# Altium PCB PCB1.PcbDoc (part 1 of 2)
Units mil, origin at the board's own origin, x right, y up, seen from the top; angles counter-clockwise.
Board outline 6000 x 4000 mil, 2 copper layers (Top Layer, Bottom Layer); 87 components, 173 nets, 478 pads, 124 vias.
Unrouted connection lines stored in the file: 148.
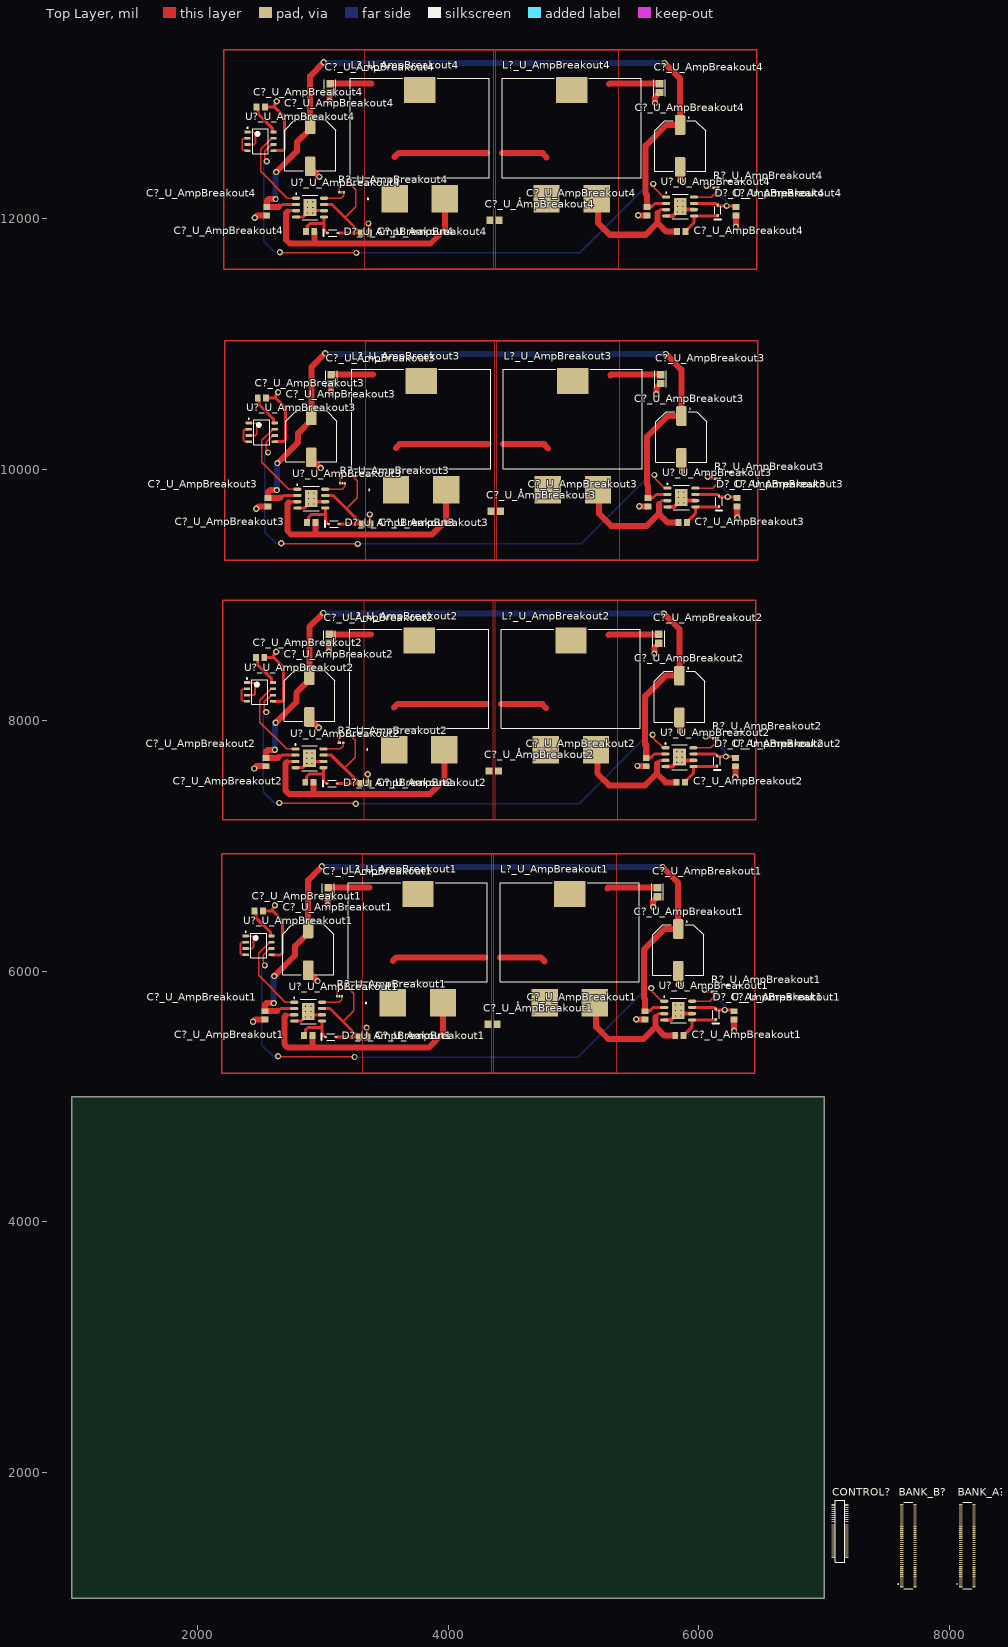
[diagram p0: Top Layer view]
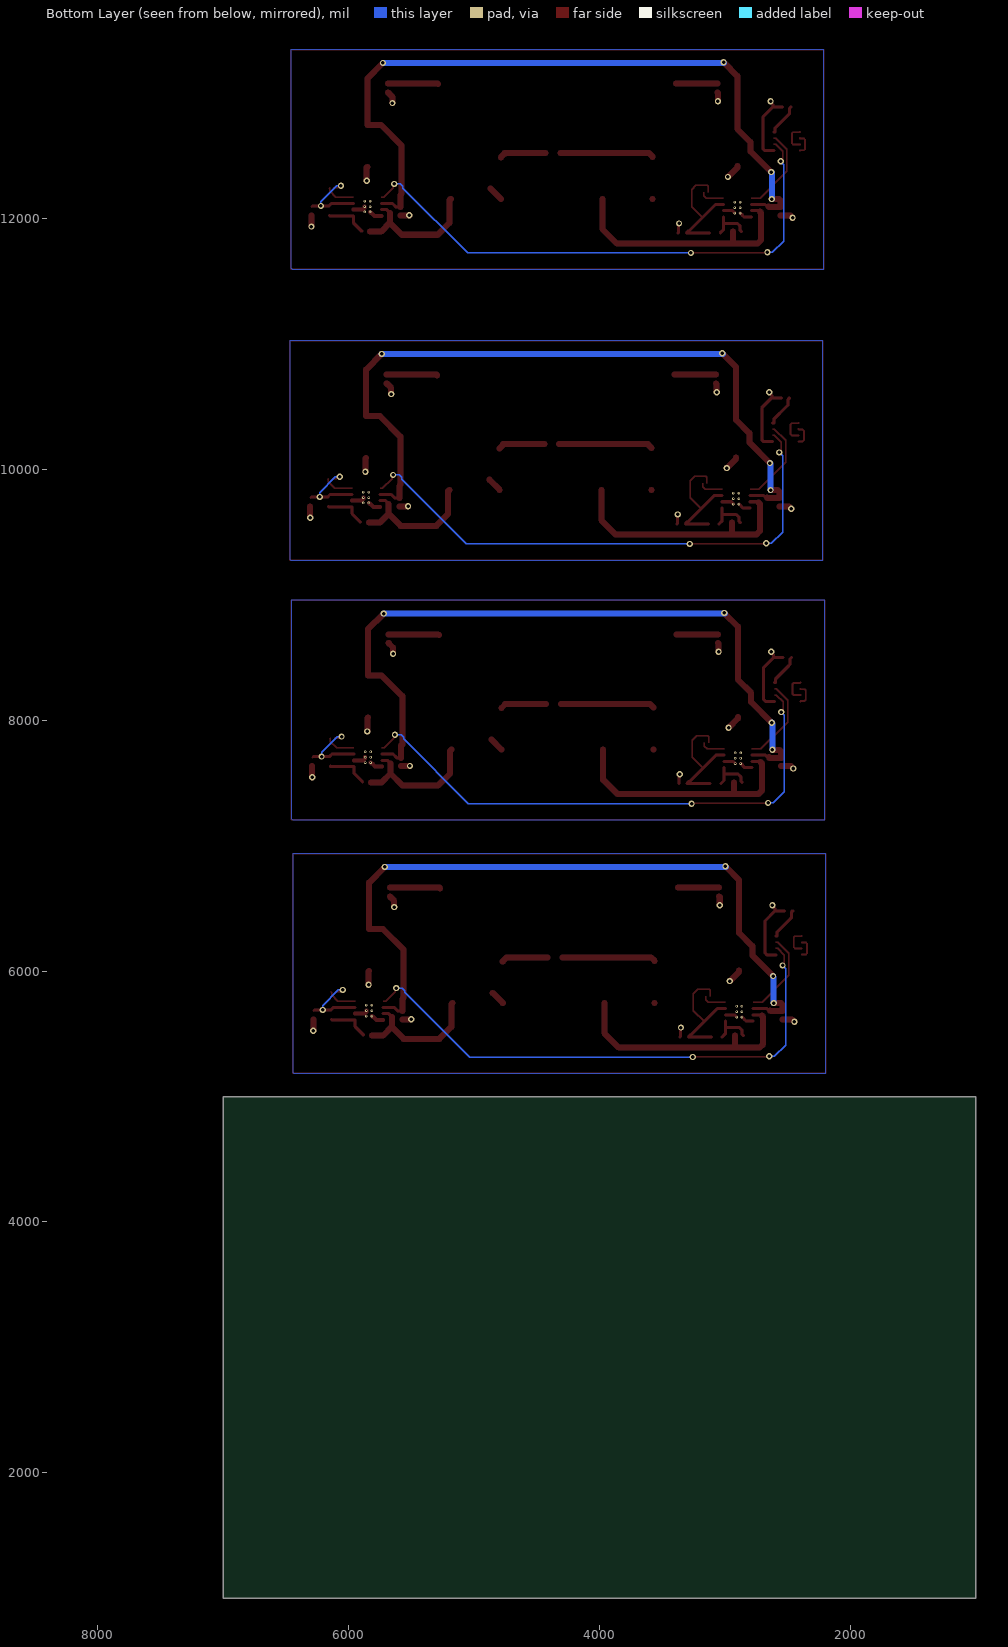
[diagram p1: Bottom Layer view, seen from below]

## Layer stack, top to bottom
Top Solder: solder mask 0.4, Solder Resist, Dk 3.5
Top Layer: signal copper 1.4
Dielectric 1: dielectric 12.6, FR-4, Dk 4.8
Bottom Layer: signal copper 1.4
Bottom Solder: solder mask 0.4, Solder Resist, Dk 3.5

## Board outline
1000,1000 7000,1000 7000,5000 1000,5000

## Design rules (kind name [scope] priority, off if disabled: settings)
Clearance [All] p1: gap=10 ignorepadtopadclearanceinfootprint=FALSE
DiffPairsRouting [All] p1: maxlimit=10 minlimit=10 mostfreqgap=10 toplayer_minwidth=15 toplayer_maxwidth=15 toplayer_prefwidth=15 bottomlayer_minwidth=15 bottomlayer_maxwidth=15 bottomlayer_prefwidth=15 maxuncoupledlength=500
PolygonConnect [All] p1: connectstyle=Relief reliefconductorwidth=10 reliefentries=4 polygonreliefangle="90 Angle" airgapwidth=10
RoutingVias [All] p1: holewidth=28 width=50 viastyle="Through Hole" minholewidth=28 minwidth=50 maxholewidth=28 maxwidth=50
SolderMaskExpansion [All] p1: expansion=4 istentingtop=FALSE
SupplyNets "Schematic Supply Nets_3" [InNet('3V3')] p1: voltage=0.000
SupplyNets "Schematic Supply Nets_2" [InNet('+12')] p2: voltage=0.000
SupplyNets "Schematic Supply Nets_1" [InNet('+3.3V')] p3: voltage=0.000
SupplyNets "Schematic Supply Nets" [InNet('GND')] p4: voltage=0.000
Width [All] p1: maxlimit=10 minlimit=10 preferedwidth=10
29 further rules are at their usual default settings.

## Classes and differential pairs
channel class AmpBreakout: U_AmpBreakout1 U_AmpBreakout2 U_AmpBreakout3 U_AmpBreakout4
component class U_AuBreakoutReuse: *? BANK_A? BANK_B? CONTROL?
component class U_AmpBreakout4: C?_U_AmpBreakout4 D?_U_AmpBreakout4 L?_U_AmpBreakout4 R?_U_AmpBreakout4 U?_U_AmpBreakout4
component class U_AmpBreakout3: C?_U_AmpBreakout3 D?_U_AmpBreakout3 L?_U_AmpBreakout3 R?_U_AmpBreakout3 U?_U_AmpBreakout3
component class U_AmpBreakout2: C?_U_AmpBreakout2 D?_U_AmpBreakout2 L?_U_AmpBreakout2 R?_U_AmpBreakout2 U?_U_AmpBreakout2
component class U_AmpBreakout1: C?_U_AmpBreakout1 D?_U_AmpBreakout1 L?_U_AmpBreakout1 R?_U_AmpBreakout1 U?_U_AmpBreakout1
differential pair IN_U_AmpBreakout4: +IN_U_AmpBreakout4_P -IN_U_AmpBreakout4_N
differential pair IN_U_AmpBreakout3: +IN_U_AmpBreakout3_P -IN_U_AmpBreakout3_N
differential pair IN_U_AmpBreakout2: +IN_U_AmpBreakout2_P -IN_U_AmpBreakout2_N
differential pair IN_U_AmpBreakout1: +IN_U_AmpBreakout1_P -IN_U_AmpBreakout1_N

## Components (designator, comment, footprint, x,y, rotation, side; value= is the part's Value field where it differs from the comment)
BANK_A? "BANK_A" HRS_DF40C-80DP-0.4V(51) 8140,1420 r90 top
BANK_B? "BANK_B" HRS_DF40C-80DP-0.4V(51) 7670,1420 r90 top
C?_U_AmpBreakout1 "Capacitor 1 uF +/- 10% 50 V 0805" CAPC2013X135X45NL10T25 3323.46,5475 r0 top value=1µF (schematic designator C?)
C?_U_AmpBreakout1 "Capacitor 1 uF +/- 10% 50 V 0805" CAPC2013X135X45NL10T25 2885,5485 r0 top value=1µF (schematic designator C?)
C?_U_AmpBreakout1 "Capacitor 1 uF +/- 10% 50 V 0805" CAPC2013X135X45NL10T25 6280,5646.54 r270 top value=1µF (schematic designator C?)
C?_U_AmpBreakout1 "Capacitor 1 uF +/- 10% 50 V 0805" CAPC2013X135X45NL10T25 5845,5485 r180 top value=1µF (schematic designator C?)
C?_U_AmpBreakout1 "C0805C683K1RACTU" FP-C0805C-DN-IPC_A 3045,6629.54 r90 top value=68nF (schematic designator C?)
C?_U_AmpBreakout1 "C2012X7R1H334K125AA" CAPC2012X14M 4355,5575 r180 top value=330nF (schematic designator C?)
C?_U_AmpBreakout1 "220µF" CAPAE1030X1080N_UWT1H221MNL1GS 5835,6168.07 r270 top (schematic designator C?)
C?_U_AmpBreakout1 "220µF" CAPAE1030X1080N_UWT1H221MNL1GS 2885,6173.07 r270 top (schematic designator C?)
C?_U_AmpBreakout1 "Capacitor 1 uF +/- 10% 50 V 0805" CAPC2013X135X45NL10T25 2491.54,6480 r0 top value=1µF (schematic designator C?)
C?_U_AmpBreakout1 "Capacitor 1 uF +/- 10% 50 V 0805" CAPC2013X135X45NL10T25 2540,5646.54 r270 top value=1µF (schematic designator C?)
C?_U_AmpBreakout1 "Capacitor 1 uF +/- 10% 50 V 0805" CAPC2013X135X45NL10T25 5570,5646.54 r270 top value=1µF (schematic designator C?)
C?_U_AmpBreakout1 "C0805C683K1RACTU" FP-C0805C-DN-IPC_A 5670,6629.54 r270 top value=68nF (schematic designator C?)
C?_U_AmpBreakout2 "Capacitor 1 uF +/- 10% 50 V 0805" CAPC2013X135X45NL10T25 3333.46,7495 r0 top value=1µF (schematic designator C?)
C?_U_AmpBreakout2 "Capacitor 1 uF +/- 10% 50 V 0805" CAPC2013X135X45NL10T25 2895,7505 r0 top value=1µF (schematic designator C?)
C?_U_AmpBreakout2 "Capacitor 1 uF +/- 10% 50 V 0805" CAPC2013X135X45NL10T25 6290,7666.54 r270 top value=1µF (schematic designator C?)
C?_U_AmpBreakout2 "Capacitor 1 uF +/- 10% 50 V 0805" CAPC2013X135X45NL10T25 5855,7505 r180 top value=1µF (schematic designator C?)
C?_U_AmpBreakout2 "C0805C683K1RACTU" FP-C0805C-DN-IPC_A 3055,8649.54 r90 top value=68nF (schematic designator C?)
C?_U_AmpBreakout2 "C2012X7R1H334K125AA" CAPC2012X14M 4365,7595 r180 top value=330nF (schematic designator C?)
C?_U_AmpBreakout2 "220µF" CAPAE1030X1080N_UWT1H221MNL1GS 5845,8188.07 r270 top (schematic designator C?)
C?_U_AmpBreakout2 "220µF" CAPAE1030X1080N_UWT1H221MNL1GS 2895,8193.07 r270 top (schematic designator C?)
C?_U_AmpBreakout2 "Capacitor 1 uF +/- 10% 50 V 0805" CAPC2013X135X45NL10T25 2501.54,8500 r0 top value=1µF (schematic designator C?)
C?_U_AmpBreakout2 "Capacitor 1 uF +/- 10% 50 V 0805" CAPC2013X135X45NL10T25 2550,7666.54 r270 top value=1µF (schematic designator C?)
C?_U_AmpBreakout2 "Capacitor 1 uF +/- 10% 50 V 0805" CAPC2013X135X45NL10T25 5580,7666.54 r270 top value=1µF (schematic designator C?)
C?_U_AmpBreakout2 "C0805C683K1RACTU" FP-C0805C-DN-IPC_A 5680,8649.54 r270 top value=68nF (schematic designator C?)
C?_U_AmpBreakout3 "Capacitor 1 uF +/- 10% 50 V 0805" CAPC2013X135X45NL10T25 3348.46,9565 r0 top value=1µF (schematic designator C?)
C?_U_AmpBreakout3 "Capacitor 1 uF +/- 10% 50 V 0805" CAPC2013X135X45NL10T25 2910,9575 r0 top value=1µF (schematic designator C?)
C?_U_AmpBreakout3 "Capacitor 1 uF +/- 10% 50 V 0805" CAPC2013X135X45NL10T25 6305,9736.54 r270 top value=1µF (schematic designator C?)
C?_U_AmpBreakout3 "Capacitor 1 uF +/- 10% 50 V 0805" CAPC2013X135X45NL10T25 5870,9575 r180 top value=1µF (schematic designator C?)
C?_U_AmpBreakout3 "C0805C683K1RACTU" FP-C0805C-DN-IPC_A 3070,10719.54 r90 top value=68nF (schematic designator C?)
C?_U_AmpBreakout3 "C2012X7R1H334K125AA" CAPC2012X14M 4380,9665 r180 top value=330nF (schematic designator C?)
C?_U_AmpBreakout3 "220µF" CAPAE1030X1080N_UWT1H221MNL1GS 5860,10258.07 r270 top (schematic designator C?)
C?_U_AmpBreakout3 "220µF" CAPAE1030X1080N_UWT1H221MNL1GS 2910,10263.07 r270 top (schematic designator C?)
C?_U_AmpBreakout3 "Capacitor 1 uF +/- 10% 50 V 0805" CAPC2013X135X45NL10T25 2516.54,10570 r0 top value=1µF (schematic designator C?)
C?_U_AmpBreakout3 "Capacitor 1 uF +/- 10% 50 V 0805" CAPC2013X135X45NL10T25 2565,9736.54 r270 top value=1µF (schematic designator C?)
C?_U_AmpBreakout3 "Capacitor 1 uF +/- 10% 50 V 0805" CAPC2013X135X45NL10T25 5595,9736.54 r270 top value=1µF (schematic designator C?)
C?_U_AmpBreakout3 "C0805C683K1RACTU" FP-C0805C-DN-IPC_A 5695,10719.54 r270 top value=68nF (schematic designator C?)
C?_U_AmpBreakout4 "Capacitor 1 uF +/- 10% 50 V 0805" CAPC2013X135X45NL10T25 3338.46,11885 r0 top value=1µF (schematic designator C?)
C?_U_AmpBreakout4 "Capacitor 1 uF +/- 10% 50 V 0805" CAPC2013X135X45NL10T25 2900,11895 r0 top value=1µF (schematic designator C?)
C?_U_AmpBreakout4 "Capacitor 1 uF +/- 10% 50 V 0805" CAPC2013X135X45NL10T25 6295,12056.54 r270 top value=1µF (schematic designator C?)
C?_U_AmpBreakout4 "Capacitor 1 uF +/- 10% 50 V 0805" CAPC2013X135X45NL10T25 5860,11895 r180 top value=1µF (schematic designator C?)
C?_U_AmpBreakout4 "C0805C683K1RACTU" FP-C0805C-DN-IPC_A 3060,13039.54 r90 top value=68nF (schematic designator C?)
C?_U_AmpBreakout4 "C2012X7R1H334K125AA" CAPC2012X14M 4370,11985 r180 top value=330nF (schematic designator C?)
C?_U_AmpBreakout4 "220µF" CAPAE1030X1080N_UWT1H221MNL1GS 5850,12578.07 r270 top (schematic designator C?)
C?_U_AmpBreakout4 "220µF" CAPAE1030X1080N_UWT1H221MNL1GS 2900,12583.07 r270 top (schematic designator C?)
C?_U_AmpBreakout4 "Capacitor 1 uF +/- 10% 50 V 0805" CAPC2013X135X45NL10T25 2506.54,12890 r0 top value=1µF (schematic designator C?)
C?_U_AmpBreakout4 "Capacitor 1 uF +/- 10% 50 V 0805" CAPC2013X135X45NL10T25 2555,12056.54 r270 top value=1µF (schematic designator C?)
C?_U_AmpBreakout4 "Capacitor 1 uF +/- 10% 50 V 0805" CAPC2013X135X45NL10T25 5585,12056.54 r270 top value=1µF (schematic designator C?)
C?_U_AmpBreakout4 "C0805C683K1RACTU" FP-C0805C-DN-IPC_A 5685,13039.54 r270 top value=68nF (schematic designator C?)
CONTROL? "CONTROL" DF40C-50DP-0.4V(51) 7125,1535 r90 top
D?_U_AmpBreakout1 "1N4148WS-7-F" DIOD-SOD323-2-A_V 3065,5475 r180 top (schematic designator D?)
D?_U_AmpBreakout1 "1N4148WS-7-F" DIOD-SOD323-2-A_V 6135,5655 r270 top (schematic designator D?)
D?_U_AmpBreakout2 "1N4148WS-7-F" DIOD-SOD323-2-A_V 3075,7495 r180 top (schematic designator D?)
D?_U_AmpBreakout2 "1N4148WS-7-F" DIOD-SOD323-2-A_V 6145,7675 r270 top (schematic designator D?)
D?_U_AmpBreakout3 "1N4148WS-7-F" DIOD-SOD323-2-A_V 3090,9565 r180 top (schematic designator D?)
D?_U_AmpBreakout3 "1N4148WS-7-F" DIOD-SOD323-2-A_V 6160,9745 r270 top (schematic designator D?)
D?_U_AmpBreakout4 "1N4148WS-7-F" DIOD-SOD323-2-A_V 3080,11885 r180 top (schematic designator D?)
D?_U_AmpBreakout4 "1N4148WS-7-F" DIOD-SOD323-2-A_V 6150,12065 r270 top (schematic designator D?)
L?_U_AmpBreakout1 "PQ2614BHA-220K" IND_PQ2614_BRN 3760,6311 r0 top (schematic designator L?)
L?_U_AmpBreakout1 "PQ2614BHA-220K" IND_PQ2614_BRN 4970,6311 r0 top (schematic designator L?)
L?_U_AmpBreakout2 "PQ2614BHA-220K" IND_PQ2614_BRN 3770,8331 r0 top (schematic designator L?)
L?_U_AmpBreakout2 "PQ2614BHA-220K" IND_PQ2614_BRN 4980,8331 r0 top (schematic designator L?)
L?_U_AmpBreakout3 "PQ2614BHA-220K" IND_PQ2614_BRN 3785,10401 r0 top (schematic designator L?)
L?_U_AmpBreakout3 "PQ2614BHA-220K" IND_PQ2614_BRN 4995,10401 r0 top (schematic designator L?)
L?_U_AmpBreakout4 "PQ2614BHA-220K" IND_PQ2614_BRN 3775,12721 r0 top (schematic designator L?)
L?_U_AmpBreakout4 "PQ2614BHA-220K" IND_PQ2614_BRN 4985,12721 r0 top (schematic designator L?)
R?_U_AmpBreakout1 "100KR2F" RESC0402(1005)_L 3135,5800 r0 top value=100k (schematic designator R?)
R?_U_AmpBreakout1 "100KR2F" RESC0402(1005)_L 6122.28,5835 r0 top value=100k (schematic designator R?)
R?_U_AmpBreakout2 "100KR2F" RESC0402(1005)_L 3145,7820 r0 top value=100k (schematic designator R?)
R?_U_AmpBreakout2 "100KR2F" RESC0402(1005)_L 6132.28,7855 r0 top value=100k (schematic designator R?)
R?_U_AmpBreakout3 "100KR2F" RESC0402(1005)_L 3160,9890 r0 top value=100k (schematic designator R?)
R?_U_AmpBreakout3 "100KR2F" RESC0402(1005)_L 6147.28,9925 r0 top value=100k (schematic designator R?)
R?_U_AmpBreakout4 "100KR2F" RESC0402(1005)_L 3150,12210 r0 top value=100k (schematic designator R?)
R?_U_AmpBreakout4 "100KR2F" RESC0402(1005)_L 6137.28,12245 r0 top value=100k (schematic designator R?)
U?_U_AmpBreakout1 "MP8040DN-LF-Z" SOIC127P600X130_HS-9M 2885,5676.54 r0 top (schematic designator U?)
U?_U_AmpBreakout1 "SN65EPT23D" D0008A_L 2490,6205 r0 top (schematic designator U?)
U?_U_AmpBreakout1 "MP8040DN-LF-Z" SOIC127P600X130_HS-9M 5835,5685 r0 top (schematic designator U?)
U?_U_AmpBreakout2 "MP8040DN-LF-Z" SOIC127P600X130_HS-9M 2895,7696.54 r0 top (schematic designator U?)
U?_U_AmpBreakout2 "SN65EPT23D" D0008A_L 2500,8225 r0 top (schematic designator U?)
U?_U_AmpBreakout2 "MP8040DN-LF-Z" SOIC127P600X130_HS-9M 5845,7705 r0 top (schematic designator U?)
U?_U_AmpBreakout3 "MP8040DN-LF-Z" SOIC127P600X130_HS-9M 2910,9766.54 r0 top (schematic designator U?)
U?_U_AmpBreakout3 "SN65EPT23D" D0008A_L 2515,10295 r0 top (schematic designator U?)
U?_U_AmpBreakout3 "MP8040DN-LF-Z" SOIC127P600X130_HS-9M 5860,9775 r0 top (schematic designator U?)
U?_U_AmpBreakout4 "MP8040DN-LF-Z" SOIC127P600X130_HS-9M 2900,12086.54 r0 top (schematic designator U?)
U?_U_AmpBreakout4 "SN65EPT23D" D0008A_L 2505,12615 r0 top (schematic designator U?)
U?_U_AmpBreakout4 "MP8040DN-LF-Z" SOIC127P600X130_HS-9M 5850,12095 r0 top (schematic designator U?)

## Footprints (in the part's own frame and the unit in brackets; to place one, negate y for a bottom-side part, rotate by r counter-clockwise, add the part's x,y. Pads: shape width x height; smd on the part's side, far side on the other; paste and mask are expansions set on the pad)
CAPAE1030X1080N_UWT1H221MNL1GS [mm]
  rrect25% 3.99x2.12 smd: 1(-4.24,0) 2(4.24,0)
  silkscreen extent -5.85,-5.15 5.15,5.15
CAPC2012X14M [mm] "Chip Capacitor, 2-Leads, Body 2.00x1.25mm, IPC Low Density"
  rect 1.4x1.5 smd: 1(-0.95,0) 2(0.95,0)
  body extent -1.05,-0.67 1.05,0.67, height 1.35
CAPC2013X135X45NL10T25 [mm] "Chip Capacitor, 2-Leads, Body 2.10x1.35mm, IPC Medium Density"
  rect 1.2x1.4 smd: 1(-0.85,0) 2(0.85,0)
  body extent -1.05,-0.67 1.05,0.67, height 1.35
D0008A_L [mm] "SOIC, 8-Leads, Body 5x4mm, Pitch 1.27mm, IPC High Density"
  rrect18% 1.25x0.55 smd: 1(-2.625,1.905) 2(-2.625,0.635) 3(-2.625,-0.635) 4(-2.625,-1.905) 5(2.625,-1.905) 6(2.625,-0.635) 7(2.625,0.635) 8(2.625,1.905)
  silkscreen extent -2.75,-2.5 1.6,2.85, body extent -3,-2.45 3,2.45, height 1.63
DF40C-50DP-0.4V(51) [mm]
  rect 0.19x0.66 smd: 1(-4.8,1.355) 2(-4.4,1.355) 3(-4,1.355) 4(-3.6,1.355) 5(-3.2,1.355) 6(-2.8,1.355) 7(-2.4,1.355) 8(-2,1.355) 9(-1.6,1.355) 10(-1.2,1.355) 11(-0.8,1.355) 12(-0.4,1.355) 13(0,1.355) 14(0.4,1.355) 15(0.8,1.355) 16(1.2,1.355) 17(1.6,1.355) 18(2,1.355) 19(2.4,1.355) 20(2.8,1.355) 21(3.2,1.355) 22(3.6,1.355) 23(4,1.355) 24(4.4,1.355) 25(4.8,1.355) 26(4.8,-1.355) 27(4.4,-1.355) 28(4,-1.355) 29(3.6,-1.355) 30(3.2,-1.355) 31(2.8,-1.355) 32(2.4,-1.355) 33(2,-1.355) 34(1.6,-1.355) 35(1.2,-1.355) 36(0.8,-1.355) 37(0.4,-1.355) 38(0,-1.355) 39(-0.4,-1.355) 40(-0.8,-1.355) 41(-1.2,-1.355) 42(-1.6,-1.355) 43(-2,-1.355) 44(-2.4,-1.355) 45(-2.8,-1.355) 46(-3.2,-1.355) 47(-3.6,-1.355) 48(-4,-1.355) 49(-4.4,-1.355) 50(-4.8,-1.355)
  rect 0.35x0.66 smd: M1(-5.28,1.355) M2(5.28,1.355) M3(5.28,-1.355) M4(-5.28,-1.355)
  silkscreen extent -6.3,-0.92 6.3,0.92, body extent -5.76,-1.49 5.76,1.49, height 1.14
DIOD-SOD323-2-A_V [mm] "SOD-323, 2-Leads, Body 1.7x1.3mm, Lead Span 2.5mm"
  rect 0.59x0.45 smd: 1(-1.055,0) 2(1.055,0)
  silkscreen extent -0.85,-0.65 1.85,0.65, body extent -1.24,-0.7 1.24,0.7, height 1.2
FP-C0805C-DN-IPC_A [mil]
  rect 59.24x61.27 smd paste+0 mask+0: 1(-35.46,0) 2(35.46,0)
  silkscreen extent -65,-46 65,46, body extent -85,-50 85,50, height 10
HRS_DF40C-80DP-0.4V(51) [mm]
  rect 0.23x0.66 smd paste-1: 1(-7.8,1.355) 2(-7.8,-1.355) 3(-7.4,1.355) 4(-7.4,-1.355) 5(-7,1.355) 6(-7,-1.355) 7(-6.6,1.355) 8(-6.6,-1.355) 9(-6.2,1.355) 10(-6.2,-1.355) 11(-5.8,1.355) 12(-5.8,-1.355) 13(-5.4,1.355) 14(-5.4,-1.355) 15(-5,1.355) 16(-5,-1.355) 17(-4.6,1.355) 18(-4.6,-1.355) 19(-4.2,1.355) 20(-4.2,-1.355) 21(-3.8,1.355) 22(-3.8,-1.355) 23(-3.4,1.355) 24(-3.4,-1.355) 25(-3,1.355) 26(-3,-1.355) 27(-2.6,1.355) 28(-2.6,-1.355) 29(-2.2,1.355) 30(-2.2,-1.355) 31(-1.8,1.355) 32(-1.8,-1.355) 33(-1.4,1.355) 34(-1.4,-1.355) 35(-1,1.355) 36(-1,-1.355) 37(-0.6,1.355) 38(-0.6,-1.355) 39(-0.2,1.355) 40(-0.2,-1.355) 41(0.2,1.355) 42(0.2,-1.355) 43(0.6,1.355) 44(0.6,-1.355) 45(1,1.355) 46(1,-1.355) 47(1.4,1.355) 48(1.4,-1.355) 49(1.8,1.355) 50(1.8,-1.355) 51(2.2,1.355) 52(2.2,-1.355) 53(2.6,1.355) 54(2.6,-1.355) 55(3,1.355) 56(3,-1.355) 57(3.4,1.355) 58(3.4,-1.355) 59(3.8,1.355) 60(3.8,-1.355) 61(4.2,1.355) 62(4.2,-1.355) 63(4.6,1.355) 64(4.6,-1.355) 65(5,1.355) 66(5,-1.355) 67(5.4,1.355) 68(5.4,-1.355) 69(5.8,1.355) 70(5.8,-1.355) 71(6.2,1.355) 72(6.2,-1.355) 73(6.6,1.355) 74(6.6,-1.355) 75(7,1.355) 76(7,-1.355) 77(7.4,1.355) 78(7.4,-1.355) 79(7.8,1.355) 80(7.8,-1.355)
  rect 0.35x0.66 smd paste-1: S1(-8.275,1.355) S2(-8.275,-1.355) S3(8.275,1.355) S4(8.275,-1.355)
  silkscreen extent -8.76,-0.92 8.76,2.12
IND_PQ2614_BRN [mil]
  rect 210x220 smd paste+0 mask+0: 1(-199.8,-565.12) 2(199.8,-565.12)
  rect 250x208 smd paste-104 mask+0: 3(0,304)
  silkscreen extent -554,-570 554,395
RESC0402(1005)_L [mm] "Chip Resistor, Body 1.0x0.5mm, IPC High Density"
  rrect25% 0.5x0.55 smd: 1(-0.45,0) 2(0.45,0)
  silkscreen extent 0,-0.2 0,0.2, body extent -0.5,-0.25 0.5,0.25, height 0.3
SOIC127P600X130_HS-9M [mm] "SOIC, 8-Leads, Body 4.90x3.90mm, Pitch 1.27mm, Thermal Pad 3.45x2.56mm, IPC Low Density"
  oval 1.65x0.65 smd: 1(-2.825,1.905) 2(-2.825,0.635) 3(-2.825,-0.635) 4(-2.825,-1.905) 5(2.825,-1.905) 6(2.825,-0.635) 7(2.825,0.635) 8(2.825,1.905)
  rect 2.56x3.45 smd: 9(0,0)
  silkscreen extent -2.95,-2.5 1.6,2.9, body extent -2,-2.5 2,2.5, height 1.3

## Part data
BANK_A? BANK_B?: library part CMP-002-00074-1, "80 Position Connector Plug, Outer Shroud Contacts Surface Mount Gold", Case/Package=None, Check_prices=https://www.snapeda.com/parts/DF40C-80DP-0.4V(51)/Hirose/view-part/?ref=eda, Component Type=Standard, Design Item ID=DF40C-80DP-0.4V(51), MF="Hirose Electric", MP=DF40C-80DP-0.4V(51), Pins=80, SnapEDA_Link=https://www.snapeda.com/parts/DF40C-80DP-0.4V(51)/Hirose/view-part/?ref=snap, Source=DF40C-80DP-0.4V(51).SchLib
C?_U_AmpBreakout1 C?_U_AmpBreakout1 C?_U_AmpBreakout1 C?_U_AmpBreakout1 C?_U_AmpBreakout1 C?_U_AmpBreakout1 C?_U_AmpBreakout1 C?_U_AmpBreakout2 C?_U_AmpBreakout2 C?_U_AmpBreakout2 C?_U_AmpBreakout2 C?_U_AmpBreakout2 C?_U_AmpBreakout2 C?_U_AmpBreakout2 C?_U_AmpBreakout3 C?_U_AmpBreakout3 C?_U_AmpBreakout3 C?_U_AmpBreakout3 C?_U_AmpBreakout3 C?_U_AmpBreakout3 C?_U_AmpBreakout3 C?_U_AmpBreakout4 C?_U_AmpBreakout4 C?_U_AmpBreakout4 C?_U_AmpBreakout4 C?_U_AmpBreakout4 C?_U_AmpBreakout4 C?_U_AmpBreakout4: library part CMP-001-00007-6, "Chip Capacitor, 1 uF, +/- 10%, 50 V, 0805 (2012 Metric)", Capacitor Type=Ceramic, Case/Package=0805, Max Operating Temperature=125°C, Min Operating Temperature=-55°C, Tolerance=10%, Voltage Rating=50V, Mounting Technology=SM, Pins=2, RoHS Compliant=True
C?_U_AmpBreakout1 C?_U_AmpBreakout1 C?_U_AmpBreakout2 C?_U_AmpBreakout2 C?_U_AmpBreakout3 C?_U_AmpBreakout3 C?_U_AmpBreakout4 C?_U_AmpBreakout4: library part CMP-001-00086-1, "Ceramic Capacitor, Multilayer, Ceramic, 100V, 10% +Tol, 10% -Tol, X7R, 15% TC, 0.068uF, Surface Mount, 0805", Capacitor Type=Ceramic, Case/Package=0805, Max Operating Temperature=125°C, Min Operating Temperature=-55°C, Mounting Technology="Surface Mount", Pins=2, RoHS Compliant=Yes
C?_U_AmpBreakout1 C?_U_AmpBreakout2 C?_U_AmpBreakout3 C?_U_AmpBreakout4: library part CMP-001-00084-2, "Ceramic Capacitor, Multilayer, Ceramic, 50V, 10% +Tol, 10% -Tol, X7R, 15% TC, 0.33uF, Surface Mount, 0805", Capacitor Type=Ceramic, Case/Package=0805, Max Operating Temperature=125°C, Min Operating Temperature=-55°C, Mounting Technology="Surface Mount", Pins=2, RoHS Compliant=Yes
C?_U_AmpBreakout1 C?_U_AmpBreakout1 C?_U_AmpBreakout2 C?_U_AmpBreakout2 C?_U_AmpBreakout3 C?_U_AmpBreakout3 C?_U_AmpBreakout4 C?_U_AmpBreakout4: library part CMP-017-000000-1, "220ÂµF 50V Aluminum Electrolytic Capacitors Radial, Can - SMD 1000 Hrs @ 105Â°C", Package="Radial Nichicon", Availability=Unavailable, Component Type=Standard, Design Item ID=UWT1H221MNL1GS, MF=Nichicon, MP=UWT1H221MNL1GS, Pin Count=2, Price=None, SnapEDA_Link=https://www.snapeda.com/parts/UWT1H221MNL1GS/Nichicon/view-part/566503/?ref=snap, Source=SnapEDAsch.SchLib
CONTROL?: library part CMP-002-00073-1, "50 Position Connector Plug, Outer Shroud Contacts Surface Mount Gold", Case/Package=None, Check_prices=https://www.snapeda.com/parts/DF40C-50DP-0.4V(51)/Hirose/view-part/?ref=eda, Component Type=Standard, Design Item ID=DF40C-50DP-0.4V(51), MF="Hirose Electric Co Ltd", MP=DF40C-50DP-0.4V(51), Pins=54, SnapEDA_Link=https://www.snapeda.com/parts/DF40C-50DP-0.4V(51)/Hirose/view-part/?ref=snap, Source=DF40C-50DP-0.4V(51).SchLib
D?_U_AmpBreakout1 D?_U_AmpBreakout1 D?_U_AmpBreakout2 D?_U_AmpBreakout2 D?_U_AmpBreakout3 D?_U_AmpBreakout3 D?_U_AmpBreakout4 D?_U_AmpBreakout4: library part CMP-004-00002-2, "Fast Switching Diode, 75 V, 0.3 A, -65 to 150 degC, 2-Pin SOD323, RoHS, Tape and Reel", Case/Package=SOD, Forward Current=300mA, Forward Voltage=1.25V, Manufacturer="Diodes Inc", Max Operating Temperature=150°C, Max Surge Current=2A, Min Operating Temperature=-65°C, Package Description="2-Pin Small Outline Diode, Body 1.7 x 1.3 mm", Package Quantity=3000, Package Reference=SOD323-2, Peak Reverse Current=1uA, Datasheet URL=http://www.diodes.com/datasheets/ds30097.pdf, Datasheet Version="Rev. 25-2, 03/2016", Elements=1, Manufacturer URL=http://www.diodes.com/, Mounting Technology=SM, Packaging=TapeandReel, Pins=2, Recovery Time=4ns, RoHS Compliant=True
L?_U_AmpBreakout1 L?_U_AmpBreakout1 L?_U_AmpBreakout2 L?_U_AmpBreakout2 L?_U_AmpBreakout3 L?_U_AmpBreakout3 L?_U_AmpBreakout4 L?_U_AmpBreakout4: library part CMP-006-00021-1, "No Description Available", Mfr_Name="Bourns Electronics", Design Item ID=PQ2614BHA-220K, Source=PQ2614BHA-220K.SchLib, Type="Fixed Inductors"
R?_U_AmpBreakout1 R?_U_AmpBreakout1 R?_U_AmpBreakout2 R?_U_AmpBreakout2 R?_U_AmpBreakout3 R?_U_AmpBreakout3 R?_U_AmpBreakout4 R?_U_AmpBreakout4: library part CMP-009-00064-2, "100K 0.063W 1% 0402 (1005 Metric)  SMD", Case/Package=0402, Power=63mW, Tolerance=1%, Mounting Technology=SMT, Pins=2
U?_U_AmpBreakout1 U?_U_AmpBreakout1 U?_U_AmpBreakout2 U?_U_AmpBreakout2 U?_U_AmpBreakout3 U?_U_AmpBreakout3 U?_U_AmpBreakout4 U?_U_AmpBreakout4: library part CMP-00024-00006-1, "Half Bridge Based Peripheral Driver, 9A, PDSO8", Case/Package=HLSOP, Max Operating Temperature=85°C, Min Operating Temperature=-40°C, Nominal Supply Voltage=12V, Built-in Protections="Over Current,Under Voltage,THERMAL", Height - Seated (Max)=1.676mm, Interface IC Type="HALF BRIDGE BASED PERIPHERAL DRIVER", JESD-30 Code=R-PDSO-G8, Pins=8, RoHS Compliant=Yes
U?_U_AmpBreakout1 U?_U_AmpBreakout2 U?_U_AmpBreakout3 U?_U_AmpBreakout4: library part CMP-016-00010-1, "Low Skew Clock Driver, 65EP Series, 2 True Output(s), 0 Inverted Output(s), ECL, PDSO8", Case/Package=SOP, Max Operating Temperature=85°C, Max Supply Voltage=3.6V, Min Operating Temperature=-40°C, Min Supply Voltage=3V, Nominal Supply Voltage=3.3V, Height - Seated (Max)=1.75mm, Input Conditioning=DIFFERENTIAL, JESD-30 Code=R-PDSO-G8, JESD-609 Code=e4, Logic Type="LOW SKEW CLOCK DRIVER", Pins=8, RoHS Compliant=Yes

## Via types
v1: diameter 50, hole 28, Top Layer to Bottom Layer, 76 vias
v2: diameter 19.68, hole 7.87, Top Layer to Bottom Layer, 48 vias

## Nets (pads, with @x,y where several pads share a name; then routed paths per layer and width w, separated by ;. In a path a pad name is that pad's centre, name@x,y a point inside that pad or via, vN(x,y) a via of type N, cw(c..) or ccw(c..) an arc to the next point about the centre after c; other vN are vias at no path point)
3V3: CONTROL?.1 CONTROL?.3 CONTROL?.7 CONTROL?.9 CONTROL?.11 CONTROL?.13 CONTROL?.15
+3.3V: C?_U_AmpBreakout1.1@2458.07,6480 C?_U_AmpBreakout2.1@2468.07,8500 C?_U_AmpBreakout3.1@2483.07,10570 C?_U_AmpBreakout4.1@2473.07,12890 U?_U_AmpBreakout1.8@2593.35,6280 U?_U_AmpBreakout2.8@2603.35,8300 U?_U_AmpBreakout3.8@2618.35,10370 U?_U_AmpBreakout4.8@2608.35,12690 | length 1043
  Top Layer w24: C?_U_AmpBreakout1.1@2458.07,6480 2469.69,6468.38 2469.69,6424.06 2483.75,6410 2584.12,6309.63 2584.12,6281.17 2585.29,6280 U?_U_AmpBreakout1.8@2593.35,6280 ; C?_U_AmpBreakout2.1@2468.07,8500 2479.69,8488.38 2479.69,8444.06 2493.75,8430 2594.12,8329.63 2594.12,8301.17 2595.29,8300 U?_U_AmpBreakout2.8@2603.35,8300 ; C?_U_AmpBreakout4.1@2473.07,12890 2484.69,12878.38 2484.69,12834.06 2498.75,12820 2599.12,12719.63 2599.12,12691.17 2600.29,12690 U?_U_AmpBreakout4.8@2608.35,12690 ; C?_U_AmpBreakout3.1@2483.07,10570 2494.69,10558.38 2494.69,10514.06 2508.75,10500 2609.12,10399.63 2609.12,10371.17 2610.29,10370 U?_U_AmpBreakout3.8@2618.35,10370
+12: C?_U_AmpBreakout1.1@2540,5680 C?_U_AmpBreakout1.1@2885,6340 C?_U_AmpBreakout1.1@5570,5680 C?_U_AmpBreakout1.1@5835,6335 C?_U_AmpBreakout2.1@2550,7700 C?_U_AmpBreakout2.1@2895,8360 C?_U_AmpBreakout2.1@5580,7700 C?_U_AmpBreakout2.1@5845,8355 C?_U_AmpBreakout3.1@2565,9770 C?_U_AmpBreakout3.1@2910,10430 C?_U_AmpBreakout3.1@5595,9770 C?_U_AmpBreakout3.1@5860,10425 C?_U_AmpBreakout4.1@2555,12090 C?_U_AmpBreakout4.1@2900,12750 C?_U_AmpBreakout4.1@5585,12090 C?_U_AmpBreakout4.1@5850,12745 U?_U_AmpBreakout1.2@2773.78,5701.54 U?_U_AmpBreakout1.2@5723.78,5710 U?_U_AmpBreakout2.2@2783.78,7721.54 U?_U_AmpBreakout2.2@5733.78,7730 U?_U_AmpBreakout3.2@2798.78,9791.54 U?_U_AmpBreakout3.2@5748.78,9800 U?_U_AmpBreakout4.2@2788.78,12111.54 U?_U_AmpBreakout4.2@5738.78,12120 | length 23523.8
  Top Layer w24: v1@2609.06,5744.06 v1(2610,5745) ; v1@2619.06,7764.06 v1(2620,7765) ; v1@2624.06,12154.06 v1(2625,12155) ; v1@2634.06,9834.06 v1(2635,9835) ; 2638.33,5685.36 2649.05,5685.36 2665.23,5701.54 U?_U_AmpBreakout1.2@2773.78,5701.54 ; 2648.33,7705.36 2659.05,7705.36 2675.23,7721.54 U?_U_AmpBreakout2.2@2783.78,7721.54 ; 2653.33,12095.36 2664.05,12095.36 2680.23,12111.54 U?_U_AmpBreakout4.2@2788.78,12111.54 ; 2663.33,9775.36 2674.05,9775.36 2690.23,9791.54 U?_U_AmpBreakout3.2@2798.78,9791.54 ; C?_U_AmpBreakout1.1@5570,5680 5605,5680 5635,5710 U?_U_AmpBreakout1.2@5723.78,5710 ; C?_U_AmpBreakout2.1@5580,7700 5615,7700 5645,7730 U?_U_AmpBreakout2.2@5733.78,7730 ; C?_U_AmpBreakout4.1@5585,12090 5620,12090 5650,12120 U?_U_AmpBreakout4.2@5738.78,12120 ; C?_U_AmpBreakout3.1@5595,9770 5630,9770 5660,9800 U?_U_AmpBreakout3.2@5748.78,9800
  Top Layer w48: v1@2609.06,5744.06 2554.06,5744.06 2540,5730 C?_U_AmpBreakout1.1@2540,5680 2632.98,5680 2638.33,5685.36 ; v1(2615,5960) 2780,6125 2780,6198.19 2885,6303.19 2885,6725 v1@2990,6830 ; v1@2619.06,7764.06 2564.06,7764.06 2550,7750 C?_U_AmpBreakout2.1@2550,7700 2642.98,7700 2648.33,7705.36 ; v1@2624.06,12154.06 2569.06,12154.06 2555,12140 C?_U_AmpBreakout4.1@2555,12090 2647.98,12090 2653.33,12095.36 ; v1(2625,7980) 2790,8145 2790,8218.19 2895,8323.19 2895,8745 v1@3000,8850 ; v1(2630,12370) 2795,12535 2795,12608.19 2900,12713.19 2900,13135 v1@3005,13240 ; v1@2634.06,9834.06 2579.06,9834.06 2565,9820 C?_U_AmpBreakout3.1@2565,9770 2657.98,9770 2663.33,9775.36 ; v1(2640,10050) 2805,10215 2805,10288.19 2910,10393.19 2910,10815 v1@3015,10920 ; C?_U_AmpBreakout1.1@5570,5680 5570,5778.63 5561,5787.63 5561,6171 5725,6335 C?_U_AmpBreakout1.1@5835,6335 5835,6705 v1(5710,6830) ; C?_U_AmpBreakout2.1@5580,7700 5580,7798.63 5571,7807.63 5571,8191 5735,8355 C?_U_AmpBreakout2.1@5845,8355 5845,8725 v1(5720,8850) ; C?_U_AmpBreakout4.1@5585,12090 5585,12188.63 5576,12197.63 5576,12581 5740,12745 C?_U_AmpBreakout4.1@5850,12745 5850,13115 v1(5725,13240) ; C?_U_AmpBreakout3.1@5595,9770 5595,9868.63 5586,9877.63 5586,10261 5750,10425 C?_U_AmpBreakout3.1@5860,10425 5860,10795 v1(5735,10920)
  Bottom Layer w48: v1(2610,5745) 2610,5954.46 2615,5959.46 v1(2615,5960) ; v1(2620,7765) 2620,7974.46 2625,7979.46 v1(2625,7980) ; v1(2625,12155) 2625,12364.46 2630,12369.46 v1(2630,12370) ; v1(2635,9835) 2635,10044.46 2640,10049.46 v1(2640,10050) ; v1@2990,6830 v1(5710,6830) ; v1@3000,8850 v1(5720,8850) ; v1@3005,13240 v1(5725,13240) ; v1@3015,10920 v1(5735,10920)
  other v1: 2995,6835 3005,8855 3020,10925 3010,13245